# EAGLE board S-Mix-Replacement (EAGLE 9.5.2)
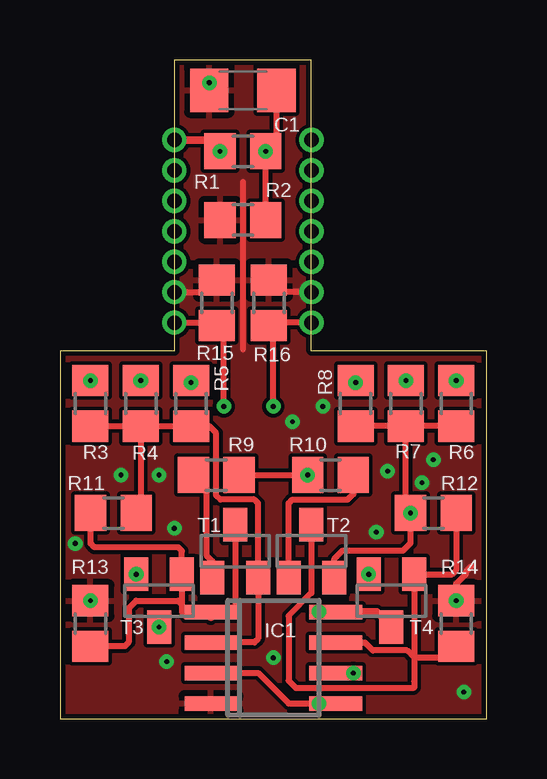
[diagram p0: board, top side]
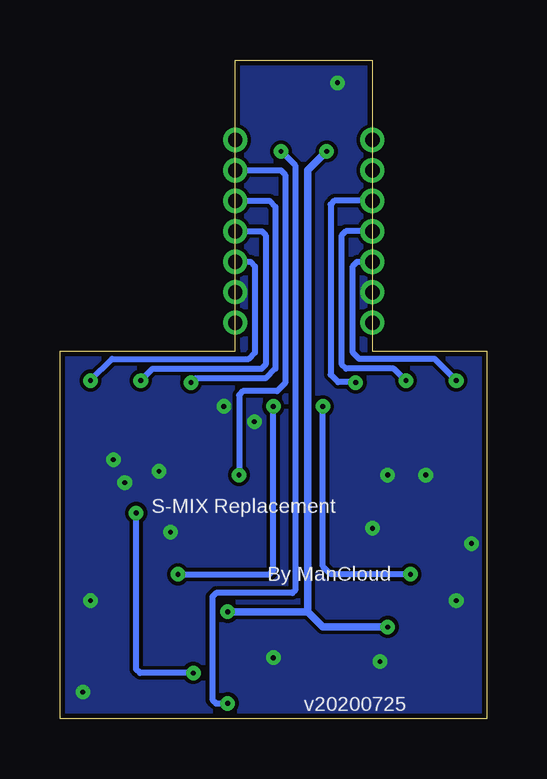
[diagram p1: board, bottom side, seen from below]

Size 17.78 x 27.46 mm. Coordinates in mm from the lower left corner, seen from the top.
Outline: 10.48,27.46 4.76,27.46 4.76,15.33 0,15.33 0,0 17.78,0 17.78,15.33 10.48,15.33 10.48,27.46
Copper layers (1*16): Top 0.035mm / dielectric 1.5mm / Bottom 0.035mm
Design rules "default *": minimum track width 6mil, minimum drill 0.2mm, track to track 6mil, track to pad 6mil, pad to pad 6mil, via to via 6mil, smd to smd 6mil, copper to edge 8mil, drill to drill 6mil, minimum pad ring 10mil, minimum via ring 8mil, stop-mask expansion 4mil, vias tented up to drill 0mil, thermal gap 10mil

## Footprints (pad centres in the part's own frame; a part is rotated, then mirrored left to right if it is on the bottom)
C1206 = smd 1.6 x 1.8: 1 -1.4,0; 2 1.4,0
SO08 = smd 0.6 x 2.2: 1 -1.905,-2.6; 2 -0.635,-2.6; 3 0.635,-2.6; 4 1.905,-2.6; 5 1.905,2.6; 6 0.635,2.6; 7 -0.635,2.6; 8 -1.905,2.6
R0805 = smd 1.3 x 1.5: 1 -0.95,0; 2 0.95,0
SOT23 = smd 1 x 1.4: 1 -0.95,-1.1; 2 0.95,-1.1; 3 0,1.1

## Placement (x,y rotation side)
C1  10u  [C1206]  7.62,26.19 180 top
IC1  LM358D  [SO08]  8.89,2.54 270 top
R1  33k  [R0805]  7.62,23.65 180 top
R2  33k  [R0805]  7.62,20.8 180 top
R3  10k  [R0805]  1.27,13.14 270 top
R4  10k  [R0805]  3.37,13.14 270 top
R5  10k  [R0805]  5.46,13.14 270 top
R6  10k  [R0805]  16.51,13.14 270 top
R7  10k  [R0805]  14.41,13.14 270 top
R8  10k  [R0805]  12.32,13.14 270 top
R9  1k  [R0805]  6.51,10.16 0 top
R10  1k  [R0805]  11.27,10.16 180 top
R11  22k  [R0805]  2.22,8.57 180 top
R12  22k  [R0805]  15.56,8.57 0 top
R13  1k8  [R0805]  1.27,3.97 270 top
R14  1k8  [R0805]  16.51,3.97 270 top
R15  1k  [R0805]  6.54,17.34 270 top
R16  1k  [R0805]  8.7,17.34 270 top
T1  BC846  [SOT23]  7.3,6.99 0 top
T2  BC846  [SOT23]  10.48,6.99 0 top
T3  BC846  [SOT23]  4.13,4.92 180 top
T4  BC846  [SOT23]  13.81,4.92 180 top

## Library data of the parts
C1 = rcl; SPICEPREFIX: C
IC1 = linear
R1-R16 = rcl; SPICEPREFIX: R
T1-T4 = transistor

## Nets
+12V: IC1.8 R1.2 T3.3 T4.3
AUDIO_IN_L: R8.1
AUDIO_IN_R: R5.1
C_AUDIO_L: R6.1
C_AUDIO_R: R3.1
E_AUDIO_L: R7.1
E_AUDIO_R: R4.1
GND: C1.2 IC1.4 R2.2 R13.1 R14.1 R15.1 R16.1
L_CHAN: R16.2 T4.2
MUTE: R9.2 R10.2
N$2: IC1.7 R12.2 R14.2 T2.3 T4.1
N$8: IC1.2 R3.2 R4.2 R5.2 R11.1 T1.2
N$11: IC1.1 R11.2 R13.2 T1.3 T3.1
N$14: R10.1 T2.1
N$15: R9.1 T1.1
N$17: IC1.6 R6.2 R7.2 R8.2 R12.1 T2.2
R_CHAN: R15.2 T3.2
VREF: C1.1 IC1.3 IC1.5 R1.1 R2.1

## Tracks (layer width: path | path; a pad name or v marks a point on that pad's centre or on a via)
+12V  (via drill 0.2 pad 0.45, 0.2 pad 0.6, 0.6)
  Top 0.305: v4.76,24.13 6.19,24.13 R1.2 | T4.3 13.19,4.45 IC1.8 11.48,4.46 v10.79,4.46
  Bottom 0.305: R1.2 7.46,22.86 7.46,4.45 | 7.46,4.45 6.84,3.82 T3.3 | v10.79,4.46 10.78,4.45 7.46,4.45
  other vias: 4.13,3.82 6.67,23.65
AUDIO_IN_L  (via drill 0.2 pad 0.6, 0.6)
  Top 0.254: R8.1 v12.32,14.01
  Bottom 0.254: v10.48,21.59 9.05,21.59 8.8,21.34 8.8,14.6 9.21,14.19 12.14,14.19 v12.32,14.01
AUDIO_IN_R  (via drill 0.2 pad 0.6, 0.6)
  Top 0.254: R5.1 v5.46,14.01
  Bottom 0.254: v4.76,21.59 6.35,21.59 6.5,21.44 6.5,14.34 6.19,14.03 5.48,14.03 v5.46,14.01
C_AUDIO_L  (via drill 0.2 pad 0.6, 0.6)
  Bottom 0.254: v10.48,19.05 9.84,19.05 9.66,18.87 9.66,15.26 9.92,15 15.61,15 R6.1
  other vias: 16.51,14.09
C_AUDIO_R  (via drill 0.2 pad 0.6, 0.6)
  Bottom 0.254: v4.76,19.05 5.4,19.05 5.58,18.87 5.58,15.26 5.32,15 2.17,15 R3.1
  other vias: 1.27,14.09
E_AUDIO_L  (via drill 0.2 pad 0.6, 0.6)
  Bottom 0.254: v10.48,20.32 9.37,20.32 9.21,20.16 9.21,14.76 9.38,14.59 13.92,14.59 R7.1
  other vias: 14.41,14.09
E_AUDIO_R  (via drill 0.2 pad 0.6, 0.6)
  Bottom 0.254: v4.76,20.32 5.87,20.32 6.03,20.16 6.03,14.76 5.86,14.59 3.86,14.59 R4.1
  other vias: 3.37,14.09
GND  (via drill 0.2 pad 0.45, 0.2 pad 0.6, 0.6)
  Top 0.254: v4.76,17.78 6.04,17.78 R15.1 | v10.48,17.78 9.21,17.78 R16.1 | 7.62,22.38 7.62,15.4 | R14.1 16.51,5.62 16.92,6.02 16.92,6.12 17.14,6.35
  other vias: 1.27,4.92 6.22,26.51 0.64,7.3 2.54,10.16 4.13,10.16 9.68,12.38 10.95,13.02 15.56,10.79 15.08,9.84 16.83,1.11 16.51,4.92 13.18,7.78 13.65,10.32 8.89,2.54 4.76,7.94 4.45,2.38
  pour Top: 0,0 0,15.24 0.16,15.4 4.76,15.4 4.76,27.46 10.48,27.46 10.48,15.72 10.79,15.4 17.62,15.4 17.78,15.24 17.78,0
  pour Bottom: 0,0 0,15.24 0.16,15.4 4.76,15.4 4.76,27.46 10.48,27.46 10.48,15.72 10.79,15.4 17.62,15.4 17.78,15.24 17.78,0
L_CHAN  (via drill 0.2 pad 0.45, 0.2 pad 0.6, 0.6)
  Top 0.254: v10.48,16.51 8.89,16.51 | 8.89,16.51 8.82,16.51 R16.2 | v8.89,13.02 8.89,16.51
  Bottom 0.254: T4.2 9.06,6.02 8.89,6.19 v8.89,13.02
  other vias: 12.86,6.02
MUTE  (via drill 0.2 pad 0.6, 0.6)
  Top 0.254: R9.2 R10.2
  Bottom 0.254: v10.48,22.86 8.57,22.86 8.39,22.68 8.39,13.99 8.73,13.65 10.16,13.65 10.32,13.49 R10.2
  other vias: 10.32,10.16
N$2
  Top 0.254: 14.76,2.54 T4.1 16.34,6.02 16.51,6.19 R12.2 | T2.3 10.48,5.24 9.53,4.29 9.53,1.59 9.84,1.27 14.72,1.27 14.76,1.31 14.76,1.54 14.76,1.59 14.76,2.54 | IC1.7 12.7,3.17 13.03,2.84 14.46,2.84 14.76,2.54 | R14.2 16.03,2.54 14.76,2.54
N$8
  Top 0.254: R3.2 R4.2 | R4.2 R5.2 6.22,12.19 6.51,11.91 6.51,9.31 6.69,9.13 8.1,9.13 8.25,8.97 T1.2 8.25,3.33 8.1,3.17 IC1.2 | R4.2 3.37,8.77 R11.1
N$11
  Top 0.254: 5.08,4.76 T3.1 5.08,6.99 4.92,7.14 1.43,7.14 1.27,7.3 R11.2 | 5.08,4.76 5.08,4.45 5.24,4.29 6.19,4.29 6.29,4.19 | IC1.1 6.29,4.19 | T1.3 7.3,4.45 7.14,4.29 6.39,4.29 6.29,4.19 | 5.08,4.76 4.92,4.92 3.17,4.92 2.86,4.6 2.86,3.17 2.7,3.02 R13.2
N$14
  Top 0.254: R10.1 12.22,9.36 11.99,9.13 9.68,9.13 9.53,8.97 T2.1
N$15
  Top 0.254: T1.1 6.35,6.57 6.1,6.82 6.1,9.62 R9.1
N$17  (via drill 0.2 pad 0.45)
  Top 0.254: R6.2 R7.2 | R7.2 R8.2 | T2.2 11.43,6.67 11.76,7 14.29,7 14.61,7.32 R12.1 14.41,8.77 R7.2 | IC1.6 v12.22,1.91
  Bottom 0.254: v12.22,1.91 14.45,1.91 14.61,2.07 R12.1
  other vias: 14.61,8.57
N$22  (via drill 0.6)
  other vias: 10.48,24.13
NC  (via drill 0.6)
  other vias: 4.76,22.86
R_CHAN  (via drill 0.2 pad 0.6, 0.6)
  Top 0.254: v4.76,16.51 6.42,16.51 R15.2 6.83,16.1 v6.83,13.02
  Bottom 0.254: T3.2 6.5,6.02 6.83,6.35 v6.83,13.02
  other vias: 3.18,6.02
VREF  (via drill 0.2 pad 0.6)
  Top 0.254: R2.1 R1.1 9.02,24.1 C1.1 | IC1.3 8.26,1.91 9.53,0.64 v10.79,0.64
  Top 0.305: IC1.5 v10.79,0.64
  Bottom 0.254: R1.1 7.99,23.07 7.99,5.35 8.1,5.24 11.27,5.24 11.43,5.08 11.43,0.79 11.27,0.64 v10.79,0.64
  other vias: 8.57,23.65

## Text on the board
bNames: S-MIX Replacement | By ManCloud | v20200725